# Altium PCB board.PcbDoc
Units mm, origin at the board's own origin, x right, y up, seen from the top; angles counter-clockwise.
Board outline 144 x 72 mm, 4 copper layers (Top Layer, NU, Mid Layer 2, Bottom Layer), stack 1.57 mm thick; 54 components, 47 nets, 200 pads, 38 vias.
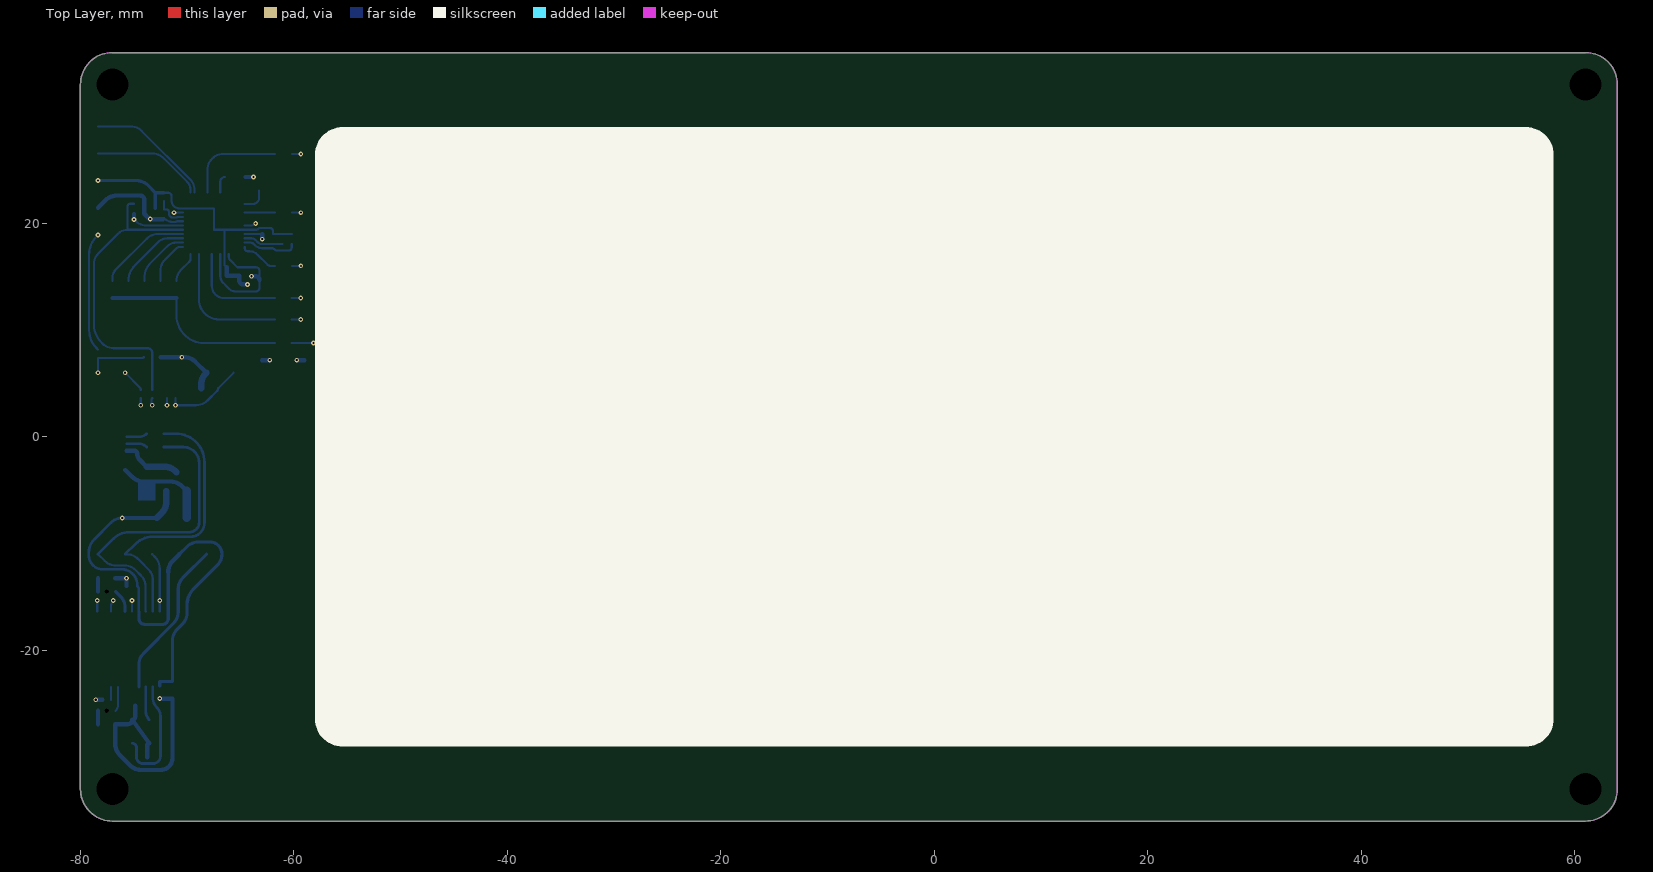
[diagram p0: Top Layer view]
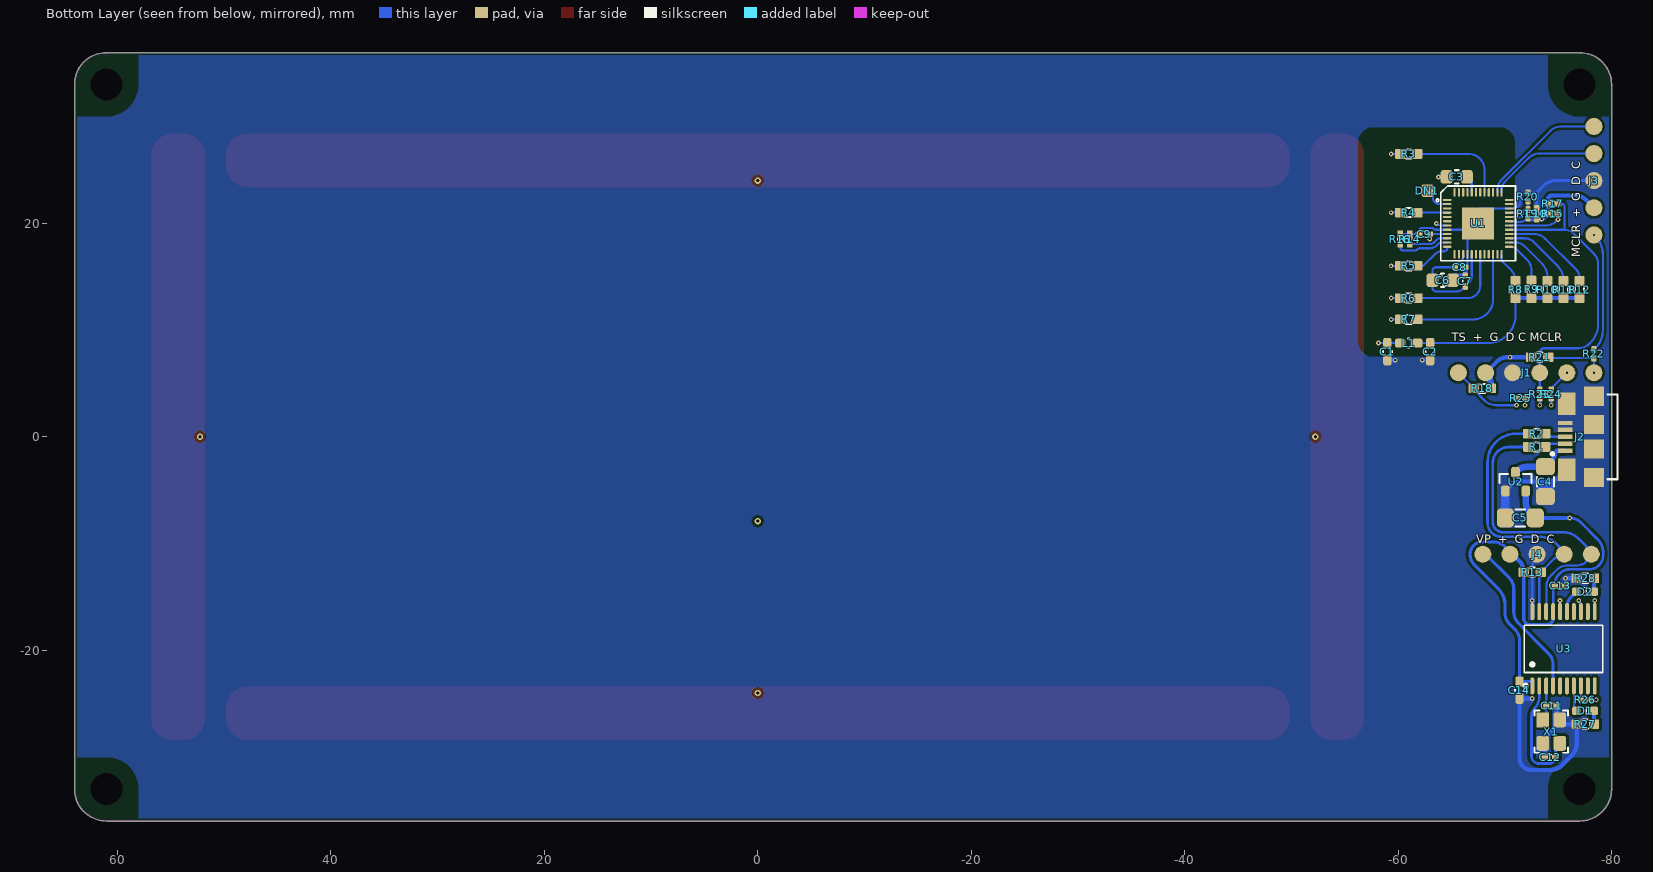
[diagram p1: Bottom Layer view, seen from below]
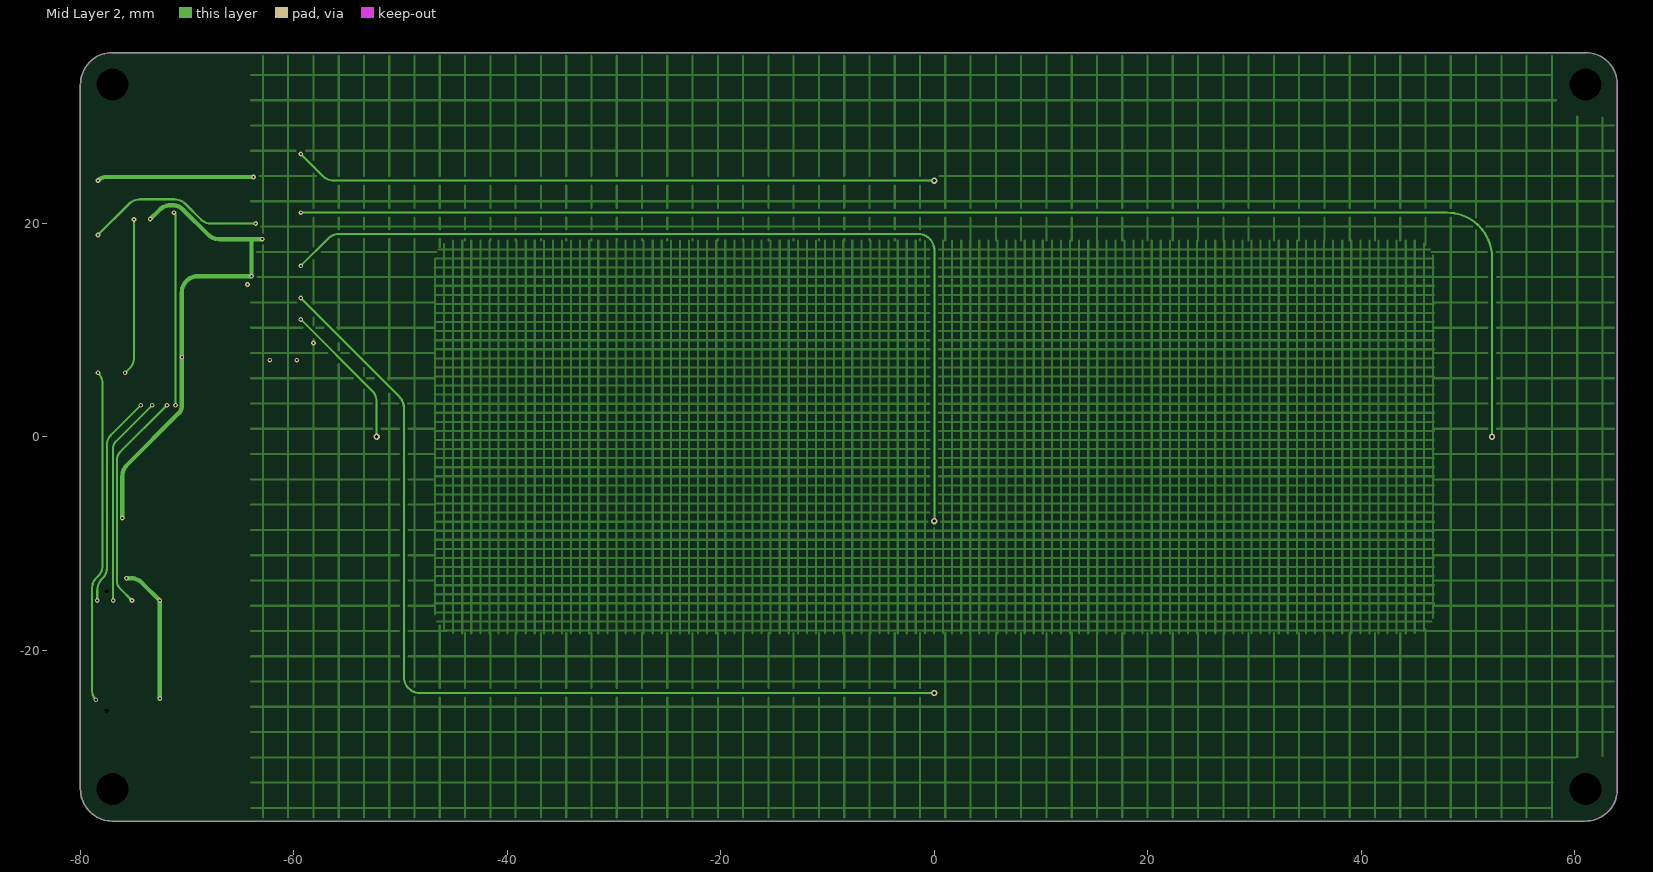
[diagram p2: Mid Layer 2]
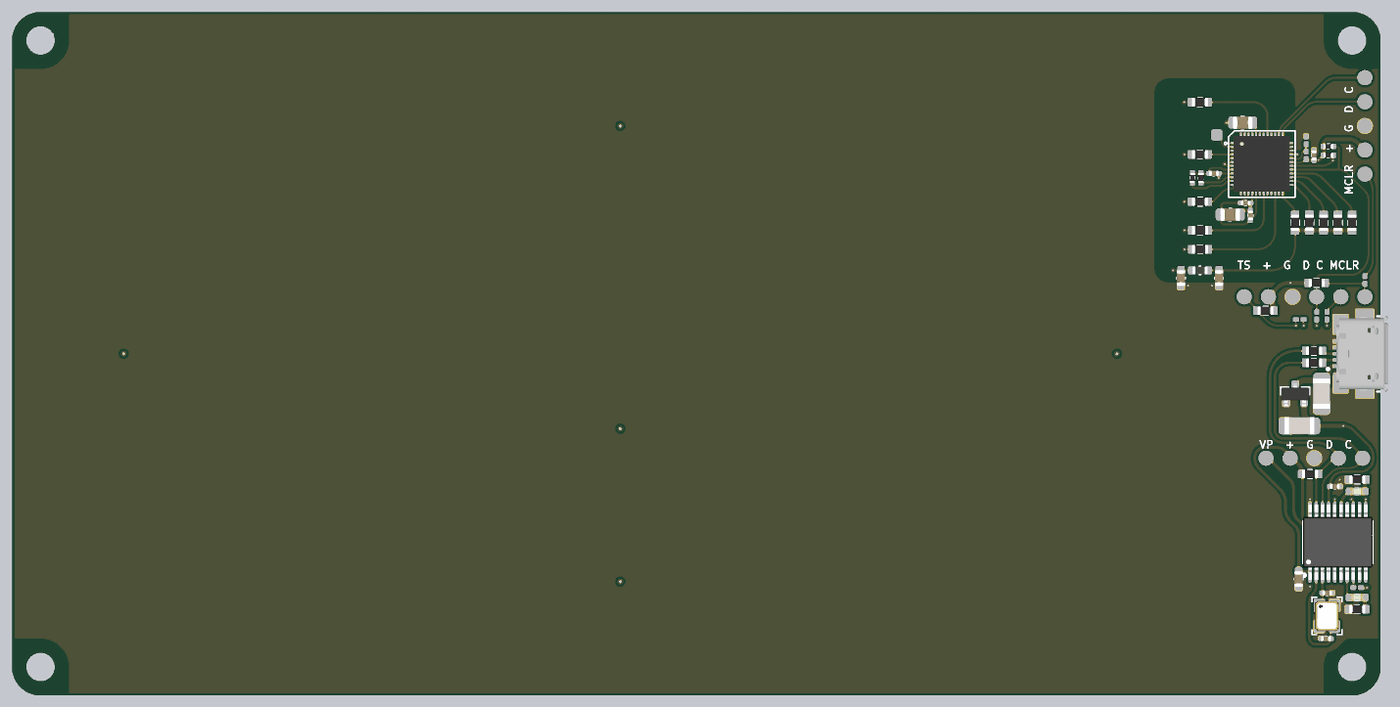
[diagram p3: 3D render of the assembled board from below, using the file's embedded part models]

## Layer stack, top to bottom
Top Solder: solder mask 0.0127, Solder Resist, Dk 3.8
Top Layer: signal copper 0.035
Dielectric 1: prepreg 0.1, 2313, Dk 4.05
NU: signal copper 0.0175
Core: core 1.265, FR-4, Dk 4.5
Mid Layer 2: signal copper 0.0175
Dielectric 2: prepreg 0.1, 2313, Dk 4.05
Bottom Layer: signal copper 0.035
Bottom Solder: solder mask 0.0127, Solder Resist, Dk 3.8

## Board outline
-80,-33 -80,33 cw(c-77,33) -77,36 61,36 cw(c61,33) 64,33 64,-33 cw(c61,-33) 61,-36 -77,-36 cw(c-77,-33)

## Design rules (kind name [scope] priority, off if disabled: settings)
AcuteAngle [All] p1: minimum=6.00000000000000E+0001 checktracksonly=FALSE
Clearance Clearance_1 [InNetClass('220')] p1: gap=2 ignorepadtopadclearanceinfootprint=FALSE except(0.13: Arc-Arc Arc-Track Arc-SMDPad Arc-Via Track-Track Track-SMDPad Track-Via SMDPad-SMDPad SMDPad-Via THPad-Via Via-Via; 0.15: Arc-THPad Arc-Text Arc-Hole Track-THPad Track-Text Track-Hole SMDPad-THPad SMDPad-Text SMDPad-Hole THPad-THPad THPad-Text THPad-Hole Via-Text Via-Hole Fill-Text Fill-Hole Poly-Text Poly-Hole Region-Text Region-Hole Text-Text Text-Hole)
Clearance [All] p2: gap=0.25 ignorepadtopadclearanceinfootprint=FALSE except(0.13: Arc-Arc Arc-Track Arc-SMDPad Arc-Via Track-Track Track-SMDPad Track-Via SMDPad-SMDPad SMDPad-Via THPad-Via Via-Via; 0.15: Arc-THPad Arc-Text Arc-Hole Track-THPad Track-Text Track-Hole SMDPad-THPad SMDPad-Text SMDPad-Hole THPad-THPad THPad-Text THPad-Hole Via-Text Via-Hole Fill-Text Fill-Hole Poly-Text Poly-Hole Region-Text Region-Hole Text-Text Text-Hole)
ComponentClearance ComponentClearance_1 [HasFootprint('HDR-1X3')] p1: gap=-1 collisioncheckmode=3 verticalgap=2540 showdistances=FALSE
ComponentClearance ComponentClearance_2 [HasFootprint('TP2030_SMD')] p2: gap=-1 collisioncheckmode=3 verticalgap=2540 showdistances=FALSE
ComponentClearance [All] p3: gap=0.3 collisioncheckmode=3 verticalgap=0.254 showdistances=FALSE
HoleSize [All] p1: absolutevalues=TRUE maxlimit=6 minlimit=0.2 maxpercent=80.000 minpercent=20.000
HoleToHoleClearance HoleToHoleClearance_1 [IsVia vs IsThruPin] p1: gap=0.7 allowstackedmicrovias=TRUE
HoleToHoleClearance [All] p2: gap=0.5 allowstackedmicrovias=TRUE
MinimumSolderMaskSliver [All] p1 off: minsoldermaskwidth=0.254
PlaneClearance [All] p1: clearance=0.45
PlaneConnect [All] p1: planeconnectstyle=Direct reliefexpansion=0.3 reliefentries=4 reliefconductorwidth=0.381 reliefairgap=0.178
PolygonConnect [All] p1: connectstyle=Direct reliefconductorwidth=0.381 reliefentries=4 polygonreliefangle="90 Angle" airgapwidth=0.356
RoutingVias [All] p1: holewidth=0.3 width=0.6 viastyle="Through Hole" minholewidth=0.2 minwidth=0.45 maxholewidth=0.9 maxwidth=1.27
SilkToSilkClearance [All] p1 off: silktosilkclearance=0.254
SilkToSolderMaskClearance [IsPad] p1 off: minsilkscreentomaskgap=0.254 clearancetoexposedcopper=TRUE
SolderMaskExpansion [All] p1: expansion=0.05 istentingtop=FALSE
UnRoutedNet [All] p1: checkbadconnections=TRUE
Width [All] p1: maxlimit=3.81 minlimit=0.14 preferedwidth=0.254
21 further rules are at their usual default settings.

## Components (designator, comment, footprint, x,y, rotation, side; value= is the part's Value field where it differs from the comment)
C1 "10pF" C0603 -59,7.98 r90 bottom
C2 "470pF" C0603 -63,7.98 r90 bottom
C3 "10uF" C0805 -65.489,24.35 r180 bottom
C4 "10uF" C1206 -73.8,-4.2 r90 bottom
C5 "10uF" C1206 -71.45,-7.6 r180 bottom
C6 "10uF" C0805 -64.169,14.665 r0 bottom
C7 "100nF" C0402 -66.299,14.589 r270 bottom
C8 "100nF" C0402 -65.799,15.884 r0 bottom
C9 "100nF" C0402 -62.466,19 r180 bottom
C10 "100nF" C0402 -72.982,20.896 r270 bottom
C11 "18pF" C0402 -74.375,-25.201 r0 bottom
C12 "18pF" C0402 -74.249,-30.014 r180 bottom
C13 "100nF" C0402 -75.184,-13.97 r0 bottom
C14 "1u" C0603 -71.374,-23.73 r90 bottom
D1 "GRN" LED-0603-GRN -77.525,-25.673 r0 bottom
D2 "GRN" LED-0603-GRN -77.525,-14.5 r0 bottom
DN1 "" PAD_CAST2_0.8MM -62.754,23.055 r90 top
J1 "TOUCH" HDR-1X6_2.54 -72,6 r90 top
J2 "MICROQTJ" CONN-USB-MICRO_#1 -75,0 r180 bottom
J3 "PROG_MGC" HDR-1X5_2.54 -78.35,24 r180 top
J4 "PROG_PIC18" HDR-1X5_2.54 -73.02,-11 r270 top
L1 "BEAD" L0603 -61,8.78 r0 bottom
R1 "22" R0603 -73,-0.95 r0 bottom
R2 "22" R0603 -73,0.3 r0 bottom
R3 "10k" R0603 -60.993,26.5 r180 bottom
R4 "10k" R0603 -60.993,21 r180 bottom
R5 "10k" R0603 -60.993,16.019 r180 bottom
R6 "10k" R0603 -61,13 r180 bottom
R7 "10k" R0603 -61,11 r180 bottom
R8 "4k7" R0603 -71,13.8 r90 bottom
R9 "4k7" R0603 -72.5,13.809 r90 bottom
R10 "4k7" R0603 -74,13.8 r90 bottom
R11 "1k" R0603 -75.5,13.8 r90 bottom
R12 "1k" R0603 -77,13.8 r90 bottom
R13 "1k5" R0603 -72.574,-12.675 r0 bottom
R14 "10k" R0402 -61.095,18.524 r270 bottom
R15 "2k" R0402 -74.5,20.896 r0 bottom
R16 "10k" R0402 -60.206,18.524 r270 bottom
R17 "2k" R0402 -74.5,21.84 r0 bottom
R18 "2k" R0603 -67.894,4.54 r180 bottom
R19 "0" JMP0402_2 -72.169,20.896 r90 bottom
R20 "0" JMP0402_2 -72.169,22.471 r90 bottom
R21 "10k" R0603 -73.27,7.46 r0 bottom
R22 "0" JMP0402_2 -78.35,7.772 r90 bottom
R23 "0" JMP0402_2 -73.27,4.007 r90 bottom
R24 "0" JMP0402_2 -74.346,4.007 r90 bottom
R25 "0" JMP0402_2 -71.494,3.607 r180 bottom
R26 "0" JMP0402_2 -77.525,-24.631 r0 bottom
R27 "220" R0603 -77.55,-26.922 r180 bottom
R28 "220" R0603 -77.55,-13.25 r180 bottom
U1 "MGC3140" QFN48_PT04_6X6 -67.5,20 r180 bottom
U2 "XC6206P332MR" SOT-23 -71,-4.2 r270 bottom
U3 "PIC18F14K50-I/SS" SSOP-20 -75.5,-19.857 r180 bottom
X1 "12MHZ" CRYSTAL_3.2x2.5mm -74.349,-27.614 r270 bottom

## Footprints (in the part's own frame and the unit in brackets; to place one, negate y for a bottom-side part, rotate by r counter-clockwise, add the part's x,y. Pads: shape width x height; smd on the part's side, far side on the other; paste and mask are expansions set on the pad)
C0402 [mm] "Chip Capacitor Body"
  rrect50% 0.635x0.508 smd mask+0.05: 1(-0.5,0) 2(0.5,0)
  silkscreen extent -0.13,-0.25 0.13,0.25, body extent -0.52,-0.27 0.53,0.28, height 0.55
C0603 [mil] "Chip Capacitor"
  rrect50% 38x31 smd mask+1.97: 1(-31.5,0) 2(31.5,0)
  silkscreen extent -3,-17 3,17, body extent -33,-18 33,18, height 35
C0805 [mil] "Chip Capacitor"
  rrect50% 45x50 smd mask+1.97: 1(-37.5,0) 2(37.5,0)
  silkscreen extent -6,-25 6,25, body extent -41,-27 41,27, height 53
C1206 [mm] "Chip Capacitor"
  rrect50% 1.6x1.8 smd: 1(-1.4,0) 2(1.4,0)
  silkscreen extent -0.45,-0.8 0.45,0.8, body extent -1.6,-0.88 1.6,0.92, height 1.6
CONN-USB-MICRO_#1 [mm] "Connector; USB2.0, Type B, SM; 5 Position; Right Angle"
  rect 1.35x0.4 smd: 1(0.675,-1.3) 2(0.675,-0.65) 3(0.675,0) 4(0.675,0.65) 5(0.675,1.3)
  rect 1.6x2.1 smd: 6(0.8,-3.1) 6(0.8,3.1)
  rect 1.9x1.8 smd: 6(3.35,-3.8) 6(3.35,-1.15) 6(3.35,1.15) 6(3.35,3.8)
  silkscreen extent -0.68,-3.98 5.55,3.95, body extent 0.35,-3.99 5.78,3.99, height 2.69
CRYSTAL_3.2x2.5mm [mm]
  rect 1.4x1.2 smd mask+0.05: 1(-1.1,-0.8)
  rrect40% 1.4x1.2 smd mask+0.05: 2(-1.1,0.8) 3(1.1,0.8) 4(1.1,-0.8)
  silkscreen extent -1.97,-1.57 1.97,1.57, body extent -1.6,-1.25 1.6,1.25, height 0.82
HDR-1X5_2.54 [mm]
  round 1.6 smd far side: 1(0,5.08) 2(0,2.54) 3(0,0) 4(0,-2.54) 5(0,-5.08)
HDR-1X6_2.54 [mm]
  round 1.6 smd far side: 1(0,6.35) 2(0,3.81) 3(0,1.27) 4(0,-1.27) 5(0,-3.81) 6(0,-6.35)
JMP0402_2 [mm] "Chip Capacitor Body"
  rrect50% 0.635x0.508 smd mask+0.05: 1(-0.4,0) 2(0.4,0)
  body extent -0.1,-0.1 0.1,0.1, height 0.01
L0603 [mil] "Chip Inductor"
  rrect50% 38x33.46 smd mask+1.97: 1(-31.5,0) 2(31.5,0)
  silkscreen extent -3,-17 3,17, body extent -31,-16 31,16, height 31
LED-0603-GRN [mm]
  rrect50% 0.8x0.8 smd mask+0.05: 1(0.825,0) 2(-0.825,0)
  silkscreen extent -0.18,-0.4 0.2,0.4, body extent -0.8,-0.4 0.8,0.4, height 0.6
PAD_CAST2_0.8MM [mm]
  rrect50% 1.2x1.2 smd far side: 1(0,0)
QFN48_PT04_6X6 [mil]
  oval 32x8 smd: 1(-114.17,86.61) 2(-114.17,70.87) 3(-114.17,55.12) 4(-114.17,39.37) 5(-114.17,23.62) 6(-114.17,7.87) 7(-114.17,-7.87) 8(-114.17,-23.62) 9(-114.17,-39.37) 10(-114.17,-55.12) 11(-114.17,-70.87) 12(-114.17,-86.61) 25(114.17,-86.61) 26(114.17,-70.87) 27(114.17,-55.12) 28(114.17,-39.37) 29(114.17,-23.62) 30(114.17,-7.87) 31(114.17,7.87) 32(114.17,23.62) 33(114.17,39.37) 34(114.17,55.12) 35(114.17,70.87) 36(114.17,86.61)
  oval 8x32 smd: 13(-86.61,-114.17) 14(-70.87,-114.17) 15(-55.12,-114.17) 16(-39.37,-114.17) 17(-23.62,-114.17) 18(-7.87,-114.17) 19(7.87,-114.17) 20(23.62,-114.17) 21(39.37,-114.17) 22(55.12,-114.17) 23(70.87,-114.17) 24(86.61,-114.17) 37(86.61,114.17) 38(70.87,114.17) 39(55.12,114.17) 40(39.37,114.17) 41(23.62,114.17) 42(7.87,114.17) 43(-7.87,114.17) 44(-23.62,114.17) 45(-39.37,114.17) 46(-55.12,114.17) 47(-70.87,114.17) 48(-86.61,114.17)
  rect 118.11x118.11 smd: 49(0,0)
  silkscreen extent -155,-138 138,138, body extent -118,-118 118,118, height 43
R0402 [mm]
  rrect10% 0.635x0.55 smd mask+0.05: 1(-0.476,0) 2(0.476,0)
  silkscreen extent -0.12,-0.25 0.13,0.25, body extent -0.52,-0.27 0.53,0.28, height 0.4
R0603 [mil] "Chip Resistor; Body 1.6 x 0.8 mm (LxW typ)"
  rrect20% 38x35.43 smd mask+1.97: 1(-31.5,0) 2(31.5,0)
  silkscreen extent -10,-17 10,17, body extent -33,-18 33,18, height 22
SOT-23 [mm]
  rrect50% 1x0.8 smd mask+0.05: 1(0.875,-0.95) 2(0.875,0.95) 3(-0.875,0)
  silkscreen extent -0.7,-1.5 0.1,1.5, body extent -1.27,-1.5 1.33,1.5, height 1.1
SSOP-20 [mm]
  oval 0.364x1.6 smd: 1(-2.925,-3.482) 2(-2.275,-3.482) 3(-1.625,-3.482) 4(-0.975,-3.482) 5(-0.325,-3.482) 6(0.325,-3.482) 7(0.975,-3.482) 8(1.625,-3.482) 9(2.275,-3.482) 10(2.925,-3.482) 11(2.925,3.482) 12(2.275,3.482) 13(1.625,3.482) 14(0.975,3.482) 15(0.325,3.482) 16(-0.325,3.482) 17(-0.975,3.482) 18(-1.625,3.482) 19(-2.275,3.482) 20(-2.925,3.482)
  silkscreen extent -3.71,-3.63 3.68,2.22, body extent -3.66,-3.95 3.66,3.95, height 1.98

## Part data
C1 C2 C3 C4 C5 C6 C7 C8 C9 C10 C13: library part CAP
C11 C12: library part CAP, "18pF 50V 0402", LCSC part number=C33149, P/N=GRM1555C1H180JA01D
C14: library part Cap
D1 D2: library part LED-0603-GREEN, "LED 0603 GRN"
DN1: library part "dummy net"
J1: library part "Header 3"
J3 J4: library part "Header 5"
L1: library part BLM18AG601SN1D, "380mΩ ±25% 600Ω@100MHz 0603 Ferrite Beads", LCSC part number=C19330, P/N=BLM18AG601SN1D
R1 R2 R14 R15 R16 R17 R18 R19 R20 R21 R22 R23 R24 R25 R26: library part RES
R3 R4 R5 R6 R7: library part RES, "10k 0603"
R8 R9 R10: library part RES, "4k7 0603"
R11 R12: library part RES, "1k 0603"
R13: library part RES, "1k5 0603"
R27 R28: library part Res1
U1: library part Component_1_1
U2: library part Component_4_1
U3: LCSC part number=C12460, P/N=PIC18F14K50-I/SS
X1: library part "CRYSTAL 12MHZ 3.20mm x 2.50mm", "CRYSTAL 12MHZ 10PF SMD", LCSC part number=C70565, P/N=X322512MOB4SI

## Free pads (board coordinates)
  round 0 hole 3 unplated: M(-77,-33) M(-77,33) M(61,-33) M(61,33)
  round 0 hole 0.4 unplated: M10(-77.525,-25.673) ""(-77.525,-14.5)

## Via types
v1: diameter 0.45, hole 0.2, Top Layer to Bottom Layer, tented both sides, 33 vias
v2: diameter 0.6, hole 0.3, Top Layer to Bottom Layer, tented both sides, 5 vias

## Nets (pads, with @x,y where several pads share a name; then routed paths per layer and width w, separated by ;. In a path a pad name is that pad's centre, name@x,y a point inside that pad or via, vN(x,y) a via of type N, cw(c..) or ccw(c..) an arc to the next point about the centre after c; other vN are vias at no path point)
3V3: C5.2 C6.2 C7.2 C8.2 C9.2 C10.2 C13.2 C14.2 J1.5 J3.2 J4.2 R13.2 R15.2 R17.2 R18.2 R19.1 R21.2 U1.9 U1.15 U1.17 U1.31 U2.2 U3.1 U3.17 | length 128.6
  Mid Layer 2 w0.4: v1(-76.079,-7.6) -76.079,-3.7 cw(c-74.581,-3.7) -75.64,-2.64 -70.783,2.217 ccw(c-71.466,2.9) -70.5,2.9 v1(-70.5,7.46) -70.5,13.547 cw(c-69.001,13.547) -69.001,15.046 v1(-63.979,15.046) -63.979,18.518 ; v1(-73.465,20.396) -72.599,21.261 cw(c-71.54,20.201) -71.54,21.7 -71.4,21.7 cw(c-71.4,20.251) -70.376,21.276 -68.057,18.957 ccw(c-66.997,20.016) -66.997,18.518 -63.979,18.518 ; v1(-62.966,18.518) -63.979,18.518
  Bottom Layer w0.2: R19.1@-72.269,20.396 R19.1 -72.115,20.442 ccw(c-71.374,21.183) -71.374,20.135 -71.109,20.135 ccw(c-71.109,20.358) -70.951,20.2 U1.31 ; U1.17 -66.9,15.071 ccw(c-65.977,15.071) -66.629,14.419 C7.2 -66.084,13.873 ccw(c-65.481,14.475) -65.481,13.623 -63.571,13.623 ccw(c-63.571,13.978) -63.217,13.978 C6.2 -63.217,15.536 ccw(c-63.564,15.536) -63.564,15.884 C8.2 -65.98,16.564 cw(c-65.691,16.854) -66.1,16.854 U1.15 ; U1.9 C9.2
  Bottom Layer w0.25: v1(-76.079,-7.6) ccw(c-76.079,-9.099) -77.139,-8.039 -78.698,-9.598 ccw(c-77.442,-10.854) -79.218,-10.854 -79.218,-11.084 ccw(c-77.881,-11.084) -77.881,-12.421 -76.113,-12.421 cw(c-76.113,-13.851) -74.683,-13.9 C13.2 cw(c-75.069,-14.355) -74.525,-14.355 U3.17
  Bottom Layer w0.3: U3.17 -74.525,-17.019 ccw(c-73.966,-17.019) -73.966,-17.577 -72.314,-17.577 ccw(c-72.314,-17.037) -71.774,-17.037 R13.2 ; U3.1 -72.575,-22.929 C14.2 -71.374,-19.095 cw(c-69.875,-19.095) -70.935,-18.035 -70.428,-17.528 ccw(c-71.457,-16.5) -70.002,-16.5 -70.002,-15.693 cw(c-67.998,-15.693) -69.415,-14.276 -67.184,-12.044 ccw(c-68.243,-10.985) -66.745,-10.985 -66.745,-10.965 ccw(c-67.854,-10.965) -67.854,-9.855 -68.955,-9.855 ccw(c-68.955,-11.354) -70.014,-10.294 J4.2@-70.725,-11.005
  Bottom Layer w0.4: J3.2 -77.649,22.161 cw(c-76.589,21.101) -76.589,22.6 -74.4,22.6 cw(c-74.4,22.224) -74.024,22.224 R17.2 R15.2 -73.566,20.438 ccw(c-73.465,20.539) v1(-73.465,20.396) C10.2 R19.1@-72.269,20.396 ; v1(-76.079,-7.6) C5.2 ; R21.2 v1(-70.5,7.46) -70.271,7.46 cw(c-70.271,5.961) -69.211,7.021 J1.5 ; R13.2 -71.774,-12.665 cw(c-70.276,-12.665) -71.335,-11.605 J4.2@-70.73,-11 ; v1(-63.979,15.046) -63.598,15.046 cw(c-63.598,14.665) C6.2 ; v1(-62.966,18.518) C9.2
  Bottom Layer w0.6: C5.2 -72.389,-7.139 ccw(c-73.449,-6.079) -71.95,-6.079 U2.2 ; R18.2 -68.694,4.875 cw(c-67.196,4.875) -68.255,5.935 J1.5
5V: C4.2 J2.1 U2.3 | length 5.7
  Bottom Layer w0.4: J2.1 -74.976,-1.3 cw(c-74.976,-1.599) -74.677,-1.599 ccw(c-73.894,-1.599) -74.447,-2.153 C4.2
  Bottom Layer w0.6: C4.2 -72.146,-2.8 cw(c-72.146,-4.299) -71.086,-3.239 U2.3
DM: J4.5 R1.2 U3.18 | length 28.7
  Bottom Layer w0.2: J4.5@-78.35,-11 -77.735,-11.615 ccw(c-76.675,-10.555) -76.675,-12.054 -75.892,-12.054 cw(c-75.892,-13.552) -74.833,-12.493 -74.327,-12.998 cw(c-75.387,-14.057) -74.295,-13.031 cw(c-75.387,-14.057) -73.894,-13.933 cw(c-75.387,-14.057) -73.889,-14.057 -73.889,-16.361 U3.18
  Bottom Layer w0.25: J4.5@-78.35,-11 -76.889,-9.539 cw(c-75.416,-11.012) -75.416,-8.929 -69.783,-8.929 ccw(c-69.783,-8.025) -68.879,-8.025 -68.879,-2.449 ccw(c-70.378,-2.449) -70.378,-0.95 R1.2
DP: J4.4 R2.2 R13.1 U3.19 | length 26.7
  Bottom Layer w0.2: J4.4@-75.81,-11 -75.67,-11 cw(c-75.67,-12.499) -74.904,-11.211 cw(c-75.67,-12.499) -74.61,-11.439 R13.1 ; R13.1@-73.485,-12.629 cw(c-74.116,-13.259) -73.225,-13.259 U3.19
  Bottom Layer w0.25: J4.4@-75.81,-11 -74.849,-10.039 cw(c-73.197,-11.691) -73.197,-9.355 -69.671,-9.355 ccw(c-69.671,-8.063) -68.379,-8.063 -68.379,-2.392 ccw(c-71.071,-2.392) -71.071,0.3 R2.2
GND: C1.1 C2.1 C3.1 C4.1 C5.1 C6.1 C7.1 C8.1 C9.1 C10.1 C11.1 C12.1 C13.1 C14.1 J1.4 J2.4 J2.5 J2.6 J3.3 J4.3 R14.1 R16.1 R20.2 R27.1 R28.1 U1.8 U1.16 U1.34 U1.49 U2.1 U3.20 X1.2 X1.4 | length 100.2
  Mid Layer 2 w0.4: v1(-78.35,24) cw(c-77.505,23.155) -77.505,24.35 v1(-63.775,24.35) ; v1(-75.684,-13.25) -75.276,-13.25 cw(c-75.276,-14.749) -74.217,-13.689 v1(-72.575,-15.331) v1(-72.575,-24.53)
  Bottom Layer w0.2: J4.3@-73.27,-11 -73.013,-11.257 cw(c-74.073,-12.317) -72.574,-12.317 U3.20 ; R20.2 -71.814,22.871 cw(c-71.814,22.515) -71.458,22.515 -71.458,22.115 ccw(c-70.743,22.115) -70.743,21.4 U1.34 -67.5,21.4 U1.49 -67.5,19.4 U1.49@-66.5,19.4 ; C8.1 -66.5,16.084 U1.16 U1.49@-66.5,19.4 ; R16.1 R14.1 C9.1 -61.966,19.288 ccw(c-62.254,19.288) -62.254,19.575 -63.11,19.575 ccw(c-63.11,19.228) -63.355,19.473 cw(c-63.532,19.65) -63.532,19.4 U1.8 U1.49@-66.5,19.4
  Bottom Layer w0.3: v1(-78.35,24) -74.732,24 cw(c-74.732,22.501) -73.673,23.561 -72.982,22.871 ; C10.1 -72.982,22.871 ; R20.2 -72.982,22.871
  Bottom Layer w0.4: R28.1 v1(-75.684,-13.25) C13.1 ; J2.6@-75.8,-3.1 -75.148,-3.752 ccw(c-74.088,-2.692) -74.088,-4.191 -71.555,-4.191 cw(c-71.555,-5.69) -70.495,-4.63 U2.1 ; C11.1 -74.875,-26.239 cw(c-75.149,-26.239) X1.2 ; C12.1 -73.749,-28.914 cw(c-73.549,-28.914) X1.4 X1.2 ; v1(-72.575,-24.53) C14.1 -71.374,-30.088 cw(c-72.5,-30.088) -72.5,-31.214 -74.334,-31.214 cw(c-74.334,-29.848) -75.3,-30.814 -76.311,-29.803 cw(c-75.251,-28.743) -76.75,-28.743 R27.1 -75.558,-26.922 ccw(c-75.558,-26.514) X1.2 ; C8.1 C7.1 -65.122,15.089 C6.1 ccw(c-64.741,14.665) -64.741,14.284 v1(-64.36,14.284) ; C3.1 v1(-63.775,24.35) ; C2.1 v1(-62.263,7.18) ; v1(-59.737,7.18) C1.1
  Bottom Layer w0.8: C5.1 U2.1
M\C\L\R\: J1.1 R21.1 R22.1 R26.1 | length 37.5
  Mid Layer 2 w0.2: v1(-78.569,-24.631) cw(c-77.768,-23.831) -78.9,-23.831 -78.9,-14.087 cw(c-77.766,-14.087) -78.568,-13.285 -78.328,-13.045 ccw(c-79.31,-12.063) -77.921,-12.063 -77.921,4.964 ccw(c-79.386,4.964) v1(-78.35,6)
  Bottom Layer w0.2: v1(-78.35,6) R22.1 -74.281,7.372 ccw(c-74.281,7.671) R21.1
  Bottom Layer w0.4: v1(-78.569,-24.631) R26.1
NetC2_2: C2.2 L1.1 R8.1 R9.1 R10.1 R11.1 R12.1 | length 18.3
  Bottom Layer w0.2: R8.1 -71,11.376 ccw(c-68.404,11.376) -68.404,8.78 C2.2 L1.1
  Bottom Layer w0.4: R12.1 R11.1 R10.1 R9.1@-72.5,13 ; R9.1 R9.1@-72.5,13 ; R8.1 R9.1@-72.5,13
NetC3_2: C3.2 U1.44 | length 1.7
  Bottom Layer w0.2: U1.44 -66.9,23.892 cw(c-66.442,23.892) C3.2
NetC11_2: C11.2 U3.3 X1.1 | length 3.2
  Bottom Layer w0.25: U3.3@-73.875,-23.439 -73.875,-25.728 ccw(c-72.763,-25.728) X1.1
NetC12_2: C12.2 U3.2 X1.3 | length 11.2
  Bottom Layer w0.25: X1.3 cw(c-75.149,-29.114) -74.749,-29.114 C12.2 ccw(c-74.149,-30.014) -74.149,-30.614 -73.2,-30.614 ccw(c-73.2,-29.914) -72.5,-29.914 -72.5,-26.138 ccw(c-73.524,-26.138) -72.8,-25.414 cw(c-71.775,-24.389) -73.225,-24.389 U3.2@-73.225,-23.439
NetD1_1: D1.1 U3.7 | length 2.3
  Bottom Layer w0.2: D1.1 ccw(c-77.244,-25.128) -76.475,-25.128 U3.7@-76.475,-23.439
NetD1_2: D1.2 R27.2 | length 1.2
  Bottom Layer w0.4: R27.2 D1.2
NetD2_1: D2.1 U3.15 | length 2.2
  Bottom Layer w0.3: D2.1 -76.263,-14.936 cw(c-77.323,-15.996) -75.825,-15.996 U3.15
NetD2_2: D2.2 R28.2 | length 1.2
  Bottom Layer w0.4: D2.2 R28.2
NetDN1_1: DN1.1 U1.2 | length 2.3
  Bottom Layer w0.2: U1.2 -63.881,21.8 ccw(c-63.881,22.428) -63.254,22.428 DN1.1@-63.254,23.055
NetJ2_2: J2.2 R1.1 | length 2
  Bottom Layer w0.25: J2.2 -74.524,-0.65 cw(c-74.524,-1.674) R1.1
NetJ2_3: J2.3 R2.1 | length 2
  Bottom Layer w0.25: J2.3 -74.524,0 ccw(c-74.524,1.024) R2.1
NetJ3_1: J3.1 R22.2 U1.7 | length 29.2
  Mid Layer 2 w0.2: v1(-78.35,18.92) -75.455,21.815 cw(c-74.395,20.755) -74.395,22.254 -71.217,22.254 cw(c-71.217,20.755) -70.157,21.815 -68.675,20.333 ccw(c-67.819,21.188) -67.819,19.978 v1(-63.584,19.978)
  Bottom Layer w0.2: R22.2 -78.496,8.319 cw(c-76.842,9.973) -79.182,9.973 -79.182,17.074 cw(c-76.732,17.074) -78.464,18.806 v1(-78.35,18.92) ; U1.7 -64.013,19.8 ccw(c-64.013,20.407) v1(-63.584,19.978)
NetR3_2: R3.2 U1.41 | length 9.3
  Bottom Layer w0.2: U1.41 -68.1,25.001 cw(c-66.601,25.001) -66.601,26.5 R3.2
NetR4_2: R4.2 U1.4 | length 2.8
  Bottom Layer w0.2: U1.4 R4.2
NetR5_2: R5.2 U1.12 | length 3.6
  Bottom Layer w0.2: U1.12 -64.6,17.644 ccw(c-64.346,17.644) -64.346,17.391 -64.167,17.391 cw(c-64.167,16.35) -63.432,17.086 -62.464,16.118 ccw(c-62.225,16.358) -62.225,16.019 R5.2
NetR6_2: R6.2 U1.19 | length 9.5
  Bottom Layer w0.2: U1.19 -67.7,14.165 ccw(c-66.535,14.165) -66.535,13 R6.2
NetR7_2: R7.2 U1.22 | length 12.4
  Bottom Layer w0.2: U1.22 -68.9,12.869 ccw(c-67.03,12.869) -67.03,11 R7.2
NetR8_2: R8.2 U1.24 | length 3
  Bottom Layer w0.2: R8.2 cw(c-69.535,14.6) -70.571,15.636 -69.807,16.4 ; -69.807,16.4 ccw(c-70.066,16.659) -69.7,16.659 U1.24
NetR9_2: R9.2 U1.25 | length 4.2
  Bottom Layer w0.2: R9.2 -72.5,15.55 cw(c-71.001,15.55) -72.061,16.61 -71.052,17.619 cw(c-70.614,17.182) -70.614,17.8 U1.25
NetR10_2: R10.2 U1.26 | length 5.6
  Bottom Layer w0.2: R10.2 -74,14.888 cw(c-72.015,14.888) -73.419,16.292 -71.857,17.854 cw(c-71.02,17.018) -71.02,18.2 U1.26
NetR11_2: R11.2 U1.27 | length 7.1
  Bottom Layer w0.2: R11.2 cw(c-73.43,14.6) -74.894,16.064 -72.727,18.23 cw(c-71.834,17.337) -71.834,18.6 U1.27
NetR12_2: R12.2 U1.28 | length 8.8
  Bottom Layer w0.2: R12.2 -77,14.88 cw(c-75.856,14.88) -76.665,15.689 -73.792,18.561 cw(c-72.733,17.502) -72.733,19 U1.28
NetR14_2: R14.2 U1.10 | length 3.7
  Bottom Layer w0.2: U1.10 -63.99,18.6 cw(c-63.99,18.026) -63.584,18.432 -63.36,18.208 ccw(c-62.974,18.594) -62.974,18.048 R14.2
NetR16_2: R16.2 U1.11 | length 5.1
  Bottom Layer w0.2: U1.11 -64.133,18.2 cw(c-64.133,17.604) -63.711,18.026 -63.625,17.939 ccw(c-62.974,18.59) -62.974,17.67 -62.077,17.67 cw(c-62.077,17.323) -61.831,17.568 ccw(c-61.525,17.875) -61.525,17.441 -60.511,17.441 ccw(c-60.511,17.746) -60.206,17.746 R16.2
NetR19_2: R19.2 R20.1 U1.32 | length 3.1
  Bottom Layer w0.2: R20.1 R19.2 -71.934,21.296 cw(c-71.934,21.074) -71.712,21.074 -71.712,20.93 ccw(c-71.314,20.93) -71.314,20.532 -71.037,20.532 ccw(c-71.037,20.658) -70.948,20.569 cw(c-70.871,20.492) -70.871,20.6 U1.32
NetR23_1: R23.1 U3.13 | length 21.6
  Mid Layer 2 w0.2: v1(-76.925,-15.331) cw(c-76.84,-15.246) -76.96,-15.246 -76.96,-1.114 cw(c-76.024,-1.114) -76.686,-0.453 v1(-73.27,2.963)
  Bottom Layer w0.2: U3.13 -77.125,-15.814 cw(c-76.442,-15.814) v1(-76.925,-15.331) ; v1(-73.27,2.963) -73.344,3.037 -73.344,3.533 R23.1
NetR24_1: R24.1 U3.11 | length 21.5
  Mid Layer 2 w0.2: v1(-78.425,-15.331) -78.425,-14.388 cw(c-76.866,-14.388) -77.968,-13.285 -77.928,-13.245 ccw(c-78.91,-12.263) -77.521,-12.263 -77.521,-0.721 cw(c-76.292,-0.721) -77.161,0.148 v1(-74.346,2.963)
  Bottom Layer w0.2: U3.11 v1(-78.425,-15.331) ; v1(-74.346,2.963) R24.1
NetR25_2: R25.2 U3.16 | length 22.4
  Mid Layer 2 w0.2: v1(-75.175,-15.331) -76.261,-14.245 cw(c-75.503,-13.486) -76.575,-13.486 -76.575,-2.163 cw(c-75.503,-2.163) -76.261,-1.404 v1(-71.894,2.963)
  Bottom Layer w0.2: U3.16@-75.175,-16.375 v1(-75.175,-15.331) ; v1(-71.894,2.963) R25.2
NetR26_2: R26.2 U3.8 | length 1.2
  Bottom Layer w0.2: R26.2 U3.8@-77.125,-23.439
PGC: J3.5 U1.38 | length 11.9
  Bottom Layer w0.2: J3.5 -75.301,29.08 cw(c-75.301,27.581) -74.241,28.641 -69.739,24.139 cw(c-70.798,23.079) -69.3,23.079 U1.38
PGD: J3.4 U1.37 | length 10.5
  Bottom Layer w0.2: J3.4 -73.261,26.54 cw(c-73.261,25.041) -72.201,26.101 -70,23.9 cw(c-70.725,23.175) -69.7,23.175 U1.37
RX0: R3.1 | length 61.2
  Mid Layer 2 w0.2: v1(-59.352,26.5) -57.291,24.439 ccw(c-56.232,25.499) -56.232,24 v2(0,24)
  Bottom Layer w0.2: R3.1 v1(-59.352,26.5)
RX1: R4.1 | length 131.6
  Mid Layer 2 w0.2: v1(-59.352,21) 48.035,21 cw(c48.035,16.785) 52.25,16.785 v2(52.25,0)
  Bottom Layer w0.2: R4.1 v1(-59.352,21)
RX2: R5.1 | length 87.6
  Mid Layer 2 w0.2: v1(-59.352,16.019) -56.81,18.561 cw(c-55.751,17.501) -55.751,19 -1.499,19 cw(c-1.499,17.501) 0,17.501 v2(0,-7.9)
  Bottom Layer w0.2: R5.1 v1(-59.352,16.019)
RX3: R6.1 | length 90.8
  Mid Layer 2 w0.2: v1(-59.359,13) -50.139,3.78 cw(c-51.199,2.72) -49.7,2.72 -49.7,-22.501 ccw(c-48.201,-22.501) -48.201,-24 v2(0,-24)
  Bottom Layer w0.2: R6.1 v1(-59.359,13)
RX4: R7.1 | length 14.7
  Mid Layer 2 w0.2: v1(-59.359,11) -52.689,4.33 cw(c-53.749,3.27) -52.25,3.27 v2(-52.25,0)
  Bottom Layer w0.2: R7.1 v1(-59.359,11)
SCL: J1.2 R15.1 R24.2 U1.30 | length 22.1
  Mid Layer 2 w0.2: v1@-75.8,6 -75.415,6.385 ccw(c-76.475,7.445) -74.976,7.445 v1(-74.976,20.348)
  Bottom Layer w0.2: v1(-75.81,6) -74.437,4.627 cw(c-74.657,4.407) R24.2 ; v1(-74.976,20.348) -74.867,20.239 ccw(c-73.808,21.299) -73.808,19.8 U1.30
  Bottom Layer w0.35: v1(-74.976,20.348) R15.1
SDA: J1.3 R17.1 R23.2 U1.29 | length 29
  Bottom Layer w0.2: R17.1 -75.315,21.84 ccw(c-75.315,21.556) -75.598,21.556 -75.598,19.4 ; R23.2 J1.3 -73.27,7.87 ccw(c-73.7,7.87) -73.7,8.3 -76.879,8.3 cw(c-76.879,9.799) -77.939,8.739 -78.044,8.844 cw(c-76.389,10.498) -78.729,10.498 -78.729,16.227 cw(c-77.399,16.227) -78.339,17.167 -76.465,19.041 cw(c-75.598,18.174) -75.598,19.4 ; U1.29 -75.598,19.4
T\S\: J1.6 R18.1 R25.1 U1.33 | length 26.3
  Mid Layer 2 w0.2: v1(-71.24,21) cw(c-71.593,20.648) -71.094,20.648 v1(-71.094,2.963)
  Bottom Layer w0.2: v1(-71.24,21) U1.33 ; R25.1 v1(-71.094,2.963) -69.159,2.963 ccw(c-69.159,4.461) -68.099,3.402 -67.188,4.313 ccw(c-67.416,4.54) R18.1 ; R18.1@-67.102,4.548 J1.6
TX: C1.2 L1.2 | length 2
  Bottom Layer w0.2: L1.2 C1.2 v1(-58.159,8.78)
VPP: J4.1 U3.4 | length 14.9
  Bottom Layer w0.3: U3.4@-74.525,-23.439 -74.525,-21.345 cw(c-73.026,-21.345) -74.086,-20.286 -71.29,-17.49 ccw(c-72.378,-16.401) -70.839,-16.401 -70.839,-14.253 cw(c-69.381,-14.253) -70.412,-13.222 J4.1@-68.19,-11
pads on no net: U1.1 U1.3 U1.5 U1.6 U1.13 U1.14 U1.18 U1.20 U1.21 U1.23 U1.35 U1.36 U1.39 U1.40 U1.42 U1.43 U1.45 U1.46 U1.47 U1.48 U3.5 U3.6 U3.9 U3.10 U3.12 U3.14

## Polygon pours and split planes (outlines as drawn)
TX on Mid Layer 2 "NONET_L02_P-001" (hatched 90Degree grid 0.85 track 0.203, pour order 2): -44.8,18.4 ccw(c-44.8,16.4) -46.8,16.4 -46.8,-16.4 ccw(c-44.8,-16.4) -44.8,-18.4 44.8,-18.4 ccw(c44.8,-16.4) 46.8,-16.4 46.8,16.4 ccw(c44.8,16.4) 44.8,18.4
TX on Mid Layer 2 "NONET_L02_P-001" (hatched 90Degree grid 2.368 track 0.203, remove dead copper, pour order 3): 5,36 5,18.4 -44.968,18.4 ccw(c-44.968,16.576) -46.792,16.576 -46.792,-16.408 ccw(c-44.8,-16.408) -44.8,-18.4 44.968,-18.4 ccw(c44.968,-16.576) 46.792,-16.576 46.792,16.408 ccw(c44.8,16.408) 44.8,18.4 5,18.4 5,36 64,36 64,-36 -64,-36 -64,36
RX2 on Top Layer "NONET_L02_P-001" (hatched 45Degree grid 4.191 track 0.203, pour order 1): -46.795,-16.4 ccw(c-44.8,-16.4) -44.8,-18.395 44.8,-18.395 ccw(c44.8,-16.4) 46.795,-16.4 46.795,16.4 ccw(c44.8,16.4) 44.8,18.395 -44.8,18.395 ccw(c-44.8,16.4) -46.795,16.4
GND on Bottom Layer "NONET_L02_P-001" (solid, remove dead copper, pour order 0): -80,36 -80,-36 64,-36 64,36

## Keep-outs
Keep-Out Layer:
  the board outline again, w0

## Other copper
Top Layer:
  region net RX4: -56.8,-26.4 ccw(c-54.8,-26.4) -54.8,-28.4 -53.8,-28.4 ccw(c-53.8,-26.4) -51.8,-26.4 -51.8,26.4 ccw(c-53.8,26.4) -53.8,28.4 -54.8,28.4 ccw(c-54.8,26.4) -56.8,26.4
  region net RX3: -49.8,-26.4 -49.8,-25.4 cw(c-47.8,-25.4) -47.8,-23.4 47.8,-23.4 cw(c47.8,-25.4) 49.8,-25.4 49.8,-26.4 cw(c47.8,-26.4) 47.8,-28.4 -47.8,-28.4 cw(c-47.8,-26.4)
  region net RX1: 51.8,-26.4 ccw(c53.8,-26.4) 53.8,-28.4 54.8,-28.4 ccw(c54.8,-26.4) 56.8,-26.4 56.8,26.4 ccw(c54.8,26.4) 54.8,28.4 53.8,28.4 ccw(c53.8,26.4) 51.8,26.4
  region net RX0: -49.8,25.4 ccw(c-47.8,25.4) -47.8,23.4 47.8,23.4 ccw(c47.8,25.4) 49.8,25.4 49.8,26.4 ccw(c47.8,26.4) 47.8,28.4 -47.8,28.4 ccw(c-47.8,26.4) -49.8,26.4
Bottom Layer:
  rectangle net GND: -74.626,-5.944 -72.974,-4.101
  pour cut-out: -69.498,29 ccw(c-69.498,27.501) -70.996,27.501 -70.996,20.899 cw(c-72.495,20.899) -72.495,19.4 -76.106,19.4 -78.729,16.778 -78.729,10.15 -76.079,7.5 -57.699,7.5 ccw(c-57.699,8.999) -56.2,8.999 -56.2,27.501 ccw(c-57.699,27.501) -57.699,29
Multi-Layer:
  pour cut-out: -74,-36 -78.501,-36 cw(c-78.501,-34.501) -80,-34.501 -80,-30 -77,-30 cw(c-77,-33) -74,-33
  pour cut-out: 64,-30 64,-34.501 cw(c62.501,-34.501) 62.501,-36 58,-36 58,-33 cw(c61,-33) 61,-30
  pour cut-out: 58,36 62.502,36 cw(c62.502,34.501) 64,34.501 64,30 61,30 cw(c61,33) 58,33
  pour cut-out: -80,30 -80,34.501 cw(c-78.501,34.501) -78.501,36 -74,36 -74,33 cw(c-77,33) -77,30

## Silkscreen, mask and mechanical layers (free items; w line width, h text height)
Top Overlay:
  region: 55.435,29 cw(c55.435,26.435) 58,26.435 58,-26.435 cw(c55.435,-26.435) 55.435,-29 -55.435,-29 cw(c-55.435,-26.435) -58,-26.435 -58,26.435 cw(c-55.435,26.435) -55.435,29
Bottom Overlay:
  text "MCLR  +  G  D  C" at -77.05,16.835 h0.8 r270
  text "TS  +  G  D C MCLR" at -65.036,8.95 h0.8
  text "VP  +  G  D  C" at -67.335,-9.95 h0.8
Mechanical 3:
  circle w0.01: c52.25,6.5 r0.3
  circle w0.01: c6,4.5 r0.3
  circle w0.01: c4,4.5 r0.3
  circle w0.01: c2,4.5 r0.3
  circle w0.01: c2,-5.585 r0.3
  circle w0.01: c1,-5.585 r0.3
  circle w0.01: c1,-24 r0.3
  circle w0.01: c0,4.5 r0.3
  circle w0.01: c0,-5.575 r0.3
  circle w0.01: c-1,-5.585 r0.3
  circle w0.01: c-2,24 r0.3
  circle w0.01: c-2,4.5 r0.3
  circle w0.01: c-2,-5.675 r0.3
  circle w0.01: c-3,-5.575 r0.3
  circle w0.01: c-4,4.5 r0.3
  circle w0.01: c-6,4.5 r0.3
  circle w0.01: c-52.25,6.5 r0.3
  circle w0.01: c52.25,6.5 r0.3
  circle w0.01: c6,4.5 r0.3
  circle w0.01: c4,4.5 r0.3
  circle w0.01: c2,4.5 r0.3
  circle w0.01: c2,-5.585 r0.3
  circle w0.01: c1,-5.585 r0.3
  circle w0.01: c1,-24 r0.3
  circle w0.01: c0,4.5 r0.3
  circle w0.01: c0,-5.575 r0.3
  circle w0.01: c-1,-5.585 r0.3
  circle w0.01: c-2,24 r0.3
  circle w0.01: c-2,4.5 r0.3
  circle w0.01: c-2,-5.675 r0.3
  circle w0.01: c-3,-5.575 r0.3
  circle w0.01: c-4,4.5 r0.3
  circle w0.01: c-6,4.5 r0.3
  circle w0.01: c-52.25,6.5 r0.3
  circle w0.01: c52.25,6.5 r0.3
  circle w0.01: c6,4.5 r0.3
  circle w0.01: c4,4.5 r0.3
  circle w0.01: c2,4.5 r0.3
  circle w0.01: c2,-5.585 r0.3
  circle w0.01: c1,-5.585 r0.3
  circle w0.01: c1,-24 r0.3
  circle w0.01: c0,4.5 r0.3
  circle w0.01: c0,-5.575 r0.3
  circle w0.01: c-1,-5.585 r0.3
  circle w0.01: c-2,24 r0.3
  circle w0.01: c-2,4.5 r0.3
  circle w0.01: c-2,-5.675 r0.3
  circle w0.01: c-3,-5.575 r0.3
  circle w0.01: c-4,4.5 r0.3
  circle w0.01: c-6,4.5 r0.3
  circle w0.01: c-52.25,6.5 r0.3
  lines w0.01: -64,-35.5 ccw(c-63.5,-35.5) -63.5,-36 63.5,-36 ccw(c63.5,-35.5) 64,-35.5 64,35.5 ccw(c63.5,35.5) 63.5,36 -63.5,36 ccw(c-63.5,35.5) -64,35.5 -64,-35.5 ; -7.349,-4.583 -4.651,-4.583 -4.651,-0.987 -7.349,-0.987 -7.349,-4.583 ; -6.45,3.275 -5.55,3.275 -5.55,5.775 -6.45,5.775 -6.45,3.275 ; -4.45,3.275 -3.55,3.275 -3.55,5.775 -4.45,5.775 -4.45,3.275 ; -3.3,-6.535 -2.7,-6.535 -2.7,-4.635 -3.3,-4.635 -3.3,-6.535 ; -2.45,3.275 -1.55,3.275 -1.55,5.775 -2.45,5.775 -2.45,3.275 ; -2.3,-6.535 -1.7,-6.535 -1.7,-4.635 -2.3,-4.635 -2.3,-6.535 ; -1.3,-6.535 -0.7,-6.535 -0.7,-4.635 -1.3,-4.635 -1.3,-6.535 ; -0.45,3.275 0.45,3.275 0.45,5.775 -0.45,5.775 -0.45,3.275 ; -0.3,-6.535 0.3,-6.535 0.3,-4.635 -0.3,-4.635 -0.3,-6.535 ; 0.7,-6.535 1.3,-6.535 1.3,-4.635 0.7,-4.635 0.7,-6.535 ; 1.55,3.275 2.45,3.275 2.45,5.775 1.55,5.775 1.55,3.275 ; 1.7,-6.535 2.3,-6.535 2.3,-4.635 1.7,-4.635 1.7,-6.535 ; 2.7,-6.535 3.3,-6.535 3.3,-4.635 2.7,-4.635 2.7,-6.535 ; 3.55,3.275 4.45,3.275 4.45,5.775 3.55,5.775 3.55,3.275 ; 4.651,-4.583 7.349,-4.583 7.349,-0.987 4.651,-0.987 4.651,-4.583 ; 5.55,3.275 6.45,3.275 6.45,5.775 5.55,5.775 5.55,3.275
Mechanical 4:
  drawing of 707 lines, arcs and shapes, not listed
Mechanical 5:
  drawing of 418 lines, arcs and shapes, not listed
Mechanical 6:
  lines w0.01: -46.8,-13.289 -15.112,18.4 ; -46.8,-11.845 -40.245,-18.4 ; -46.8,-4.911 -23.49,18.4 ; -46.8,-3.467 -31.867,-18.4 ; -46.8,3.467 -31.867,18.4 ; -46.8,4.911 -23.49,-18.4 ; -46.8,11.845 -40.245,18.4 ; -46.8,13.289 -15.112,-18.4 ; -43.534,-18.4 -6.734,18.4 ; -43.534,18.4 -6.734,-18.4 ; -35.156,-18.4 1.644,18.4 ; -35.156,18.4 1.644,-18.4 ; -26.778,-18.4 -4.377,4.001 ; -26.778,18.4 -2.62,-5.758 ; -18.4,-18.4 3.885,3.886 ; -18.4,18.4 -4.615,4.614 ; -10.022,-18.4 2.201,-6.177 ; -10.022,18.4 3.501,4.877 ; -3.886,3.886 18.4,-18.4 ; -3.501,4.877 10.022,18.4 ; -2.084,-6.294 10.022,-18.4 ; -1.645,-18.4 35.155,18.4 ; -1.645,18.4 35.155,-18.4 ; 2.591,-5.786 26.778,18.4 ; 4.376,4.001 26.778,-18.4 ; 4.614,4.614 18.4,18.4 ; 6.733,-18.4 43.533,18.4 ; 6.733,18.4 43.533,-18.4 ; 15.111,-18.4 46.8,13.289 ; 15.111,18.4 46.8,-13.289 ; 23.489,-18.4 46.8,4.911 ; 23.489,18.4 46.8,-4.911 ; 31.867,-18.4 46.8,-3.467 ; 31.867,18.4 46.8,3.467 ; 40.245,-18.4 46.8,-11.845 ; 40.245,18.4 46.8,11.845 ; 53.7,-34.522 54.435,-34.522 ; 54.067,-35.404 54.067,-34.522 ; 55.725,-35.404 55.725,-34.522 56.239,-34.522 56.386,-34.596 56.46,-34.743 56.386,-34.89 56.239,-34.963 55.725,-34.963 ; -56.8,-26.4 ccw(c-54.8,-26.4) -54.8,-28.4 ; -56.8,-26.4 ccw(c-54.8,-26.4) -54.8,-28.4 ; -56.8,-26.4 -56.8,26.4 ; -56.8,-26.4 -56.8,26.4 ; -56.8,26.4 cw(c-54.8,26.4) -54.8,28.4 ; -56.8,26.4 cw(c-54.8,26.4) -54.8,28.4 ; -54.8,-28.4 -53.8,-28.4 ; -54.8,-28.4 -53.8,-28.4 ; -54.8,28.4 -53.8,28.4 ; -53.8,-28.4 ccw(c-53.8,-26.4) -51.8,-26.4 ; -53.8,-28.4 ccw(c-53.8,-26.4) -51.8,-26.4 ; -53.8,28.4 cw(c-53.8,26.4) -51.8,26.4 ; -53.8,28.4 cw(c-53.8,26.4) -51.8,26.4 ; -51.8,-26.4 -51.8,26.4 ; -51.8,-26.4 -51.8,26.4 ; -49.8,-26.4 ccw(c-47.8,-26.4) -47.8,-28.4 ; -49.8,-26.4 ccw(c-47.8,-26.4) -47.8,-28.4 ; -49.8,-26.4 -49.8,-25.4 ; -49.8,-25.4 cw(c-47.8,-25.4) -47.8,-23.4 ; -49.8,-25.4 cw(c-47.8,-25.4) -47.8,-23.4 ; -49.8,25.4 ccw(c-47.8,25.4) -47.8,23.4 ; -49.8,25.4 ccw(c-47.8,25.4) -47.8,23.4 ; -49.8,25.4 -49.8,26.4 ; -49.8,26.4 cw(c-47.8,26.4) -47.8,28.4 ; -49.8,26.4 cw(c-47.8,26.4) -47.8,28.4 ; -47.8,-28.4 47.8,-28.4 ; -47.8,-28.4 47.8,-28.4 ; -47.8,-23.4 47.8,-23.4 ; -47.8,-23.4 47.8,-23.4 ; -47.8,23.4 47.8,23.4 ; -47.8,23.4 47.8,23.4 ; -47.8,28.4 47.8,28.4 ; -47.8,28.4 47.8,28.4 ; 47.8,-28.4 ccw(c47.8,-26.4) 49.8,-26.4 ; 47.8,-28.4 ccw(c47.8,-26.4) 49.8,-26.4 ; 47.8,-23.4 cw(c47.8,-25.4) 49.8,-25.4 ; 47.8,-23.4 cw(c47.8,-25.4) 49.8,-25.4 ; 47.8,23.4 ccw(c47.8,25.4) 49.8,25.4 ; 47.8,23.4 ccw(c47.8,25.4) 49.8,25.4 ; 47.8,28.4 cw(c47.8,26.4) 49.8,26.4 ; 47.8,28.4 cw(c47.8,26.4) 49.8,26.4 ; 49.8,-26.4 49.8,-25.4 ; 49.8,-26.4 49.8,-25.4 ; 49.8,25.4 49.8,26.4 ; 49.8,25.4 49.8,26.4 ; 51.8,-26.4 ccw(c53.8,-26.4) 53.8,-28.4 ; 51.8,-26.4 ccw(c53.8,-26.4) 53.8,-28.4 ; 51.8,-26.4 51.8,26.4 ; 51.8,26.4 cw(c53.8,26.4) 53.8,28.4 ; 51.8,26.4 cw(c53.8,26.4) 53.8,28.4 ; 53.8,-28.4 54.8,-28.4 ; 53.8,-28.4 54.8,-28.4 ; 53.8,28.4 54.8,28.4 ; 53.8,28.4 54.8,28.4 ; 54.8,-28.4 ccw(c54.8,-26.4) 56.8,-26.4 ; 54.8,-28.4 ccw(c54.8,-26.4) 56.8,-26.4 ; 54.8,28.4 cw(c54.8,26.4) 56.8,26.4 ; 54.8,28.4 cw(c54.8,26.4) 56.8,26.4 ; 56.8,-26.4 56.8,26.4 ; 56.8,-26.4 56.8,26.4 ; -46.8,-16.4 ccw(c-44.8,-16.4) -44.8,-18.4 44.8,-18.4 ccw(c44.8,-16.4) 46.8,-16.4 46.8,16.4 ccw(c44.8,16.4) 44.8,18.4 -44.8,18.4 ccw(c-44.8,16.4) -46.8,16.4 -46.8,-16.4 ; -4.625,4.5 ccw(c-4,4.5) -3.375,4.5 ccw(c-4,4.5) -4.625,4.5 ; -2.625,-5.675 cw(c-2,-5.675) -1.534,-5.259 cw(c-1.001,-5.584) -0.504,-5.205 cw(c-0.001,-5.574) 0.503,-5.205 cw(c1,-5.584) 1.5,-5.21 cw(c2,-5.585) 2.625,-5.585 cw(c2,-5.585) 1.5,-5.96 cw(c1,-5.585) 0.496,-5.955 cw(c-0.001,-5.574) -0.497,-5.955 cw(c-1.001,-5.586) -1.467,-6.001 cw(c-2,-5.675) -2.625,-5.675 ; 3.375,4.5 ccw(c4,4.5) 4.625,4.5 ccw(c4,4.5) 3.375,4.5 ; 54.712,-35.11 54.786,-35.257 54.859,-35.331 55.006,-35.404 55.153,-35.404 55.3,-35.331 55.374,-35.257 55.448,-35.11 55.448,-34.816 55.374,-34.669 55.3,-34.596 55.153,-34.522 55.006,-34.522 54.859,-34.596 54.786,-34.669 54.712,-34.816 54.712,-35.11

## Text inside footprints (layer, text, board x,y; h text height)
J2: Mechanical 1 "PCB Edge" at -80.225,-3.7 h0.25 r270